# Altium PCB RacePCB.PcbDoc
Units mm, origin at the board's own origin, x right, y up, seen from the top; angles counter-clockwise.
Board outline 82.41 x 50.6 mm, 2 copper layers (Top Layer, Bottom Layer), stack 1.471 mm thick; 52 components, 47 nets, 227 pads, 42 vias.
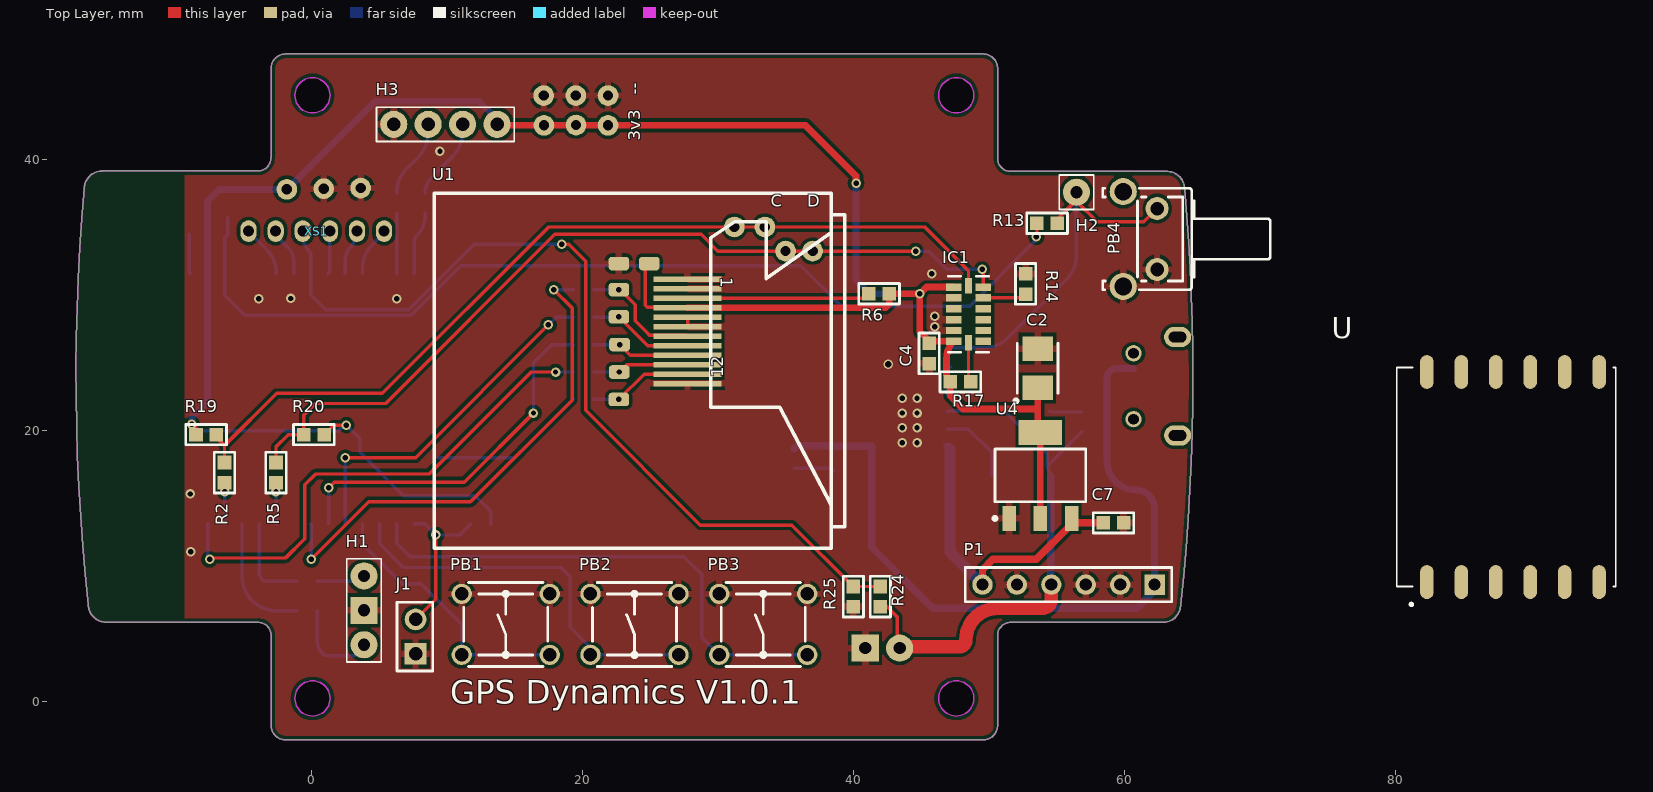
[diagram p0: Top Layer view]
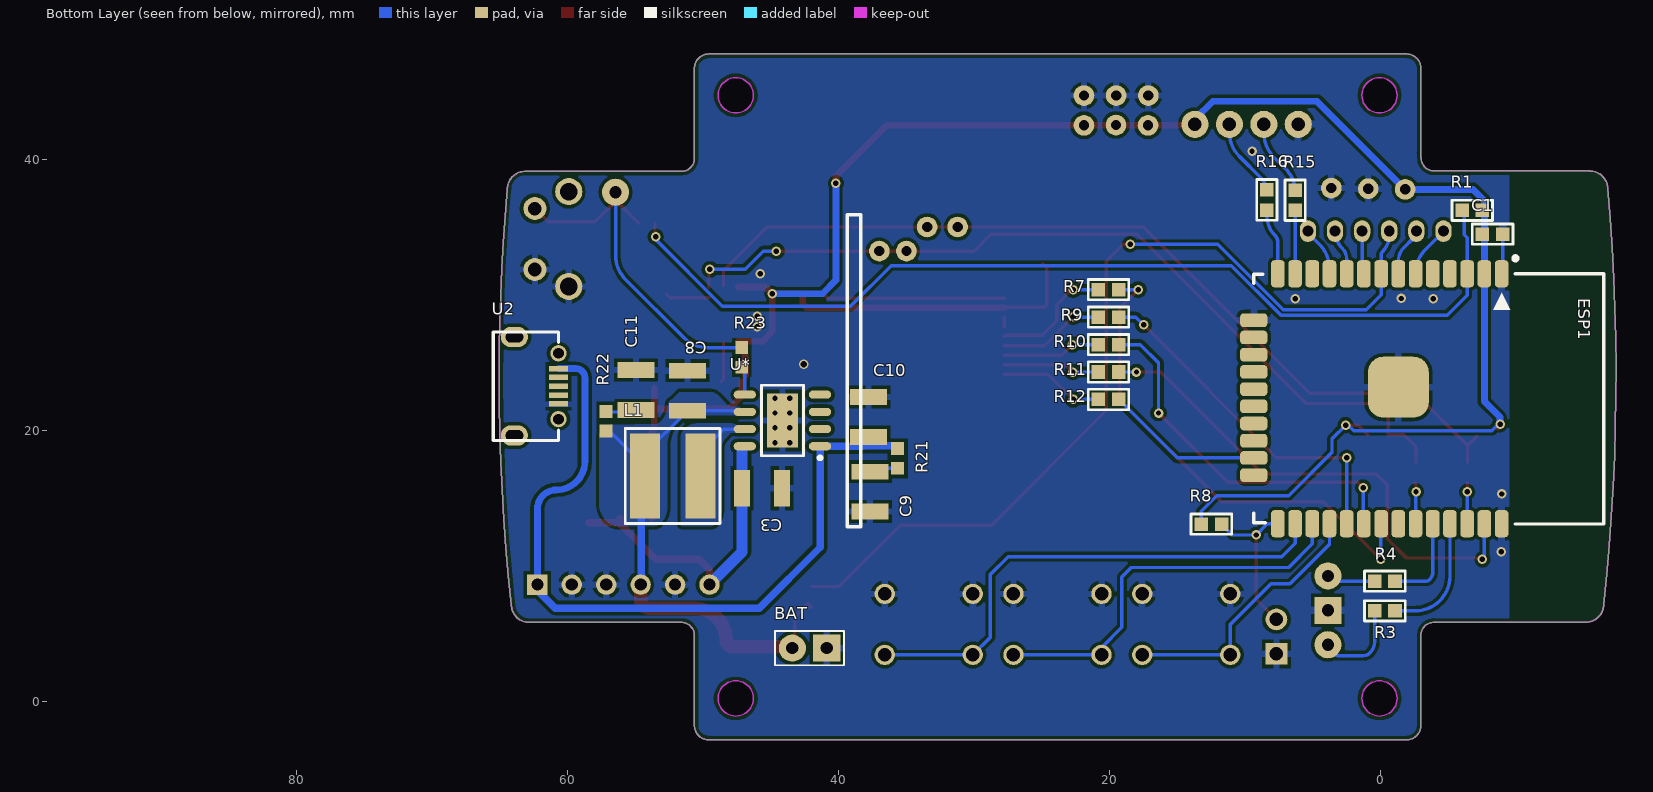
[diagram p1: Bottom Layer view, seen from below]
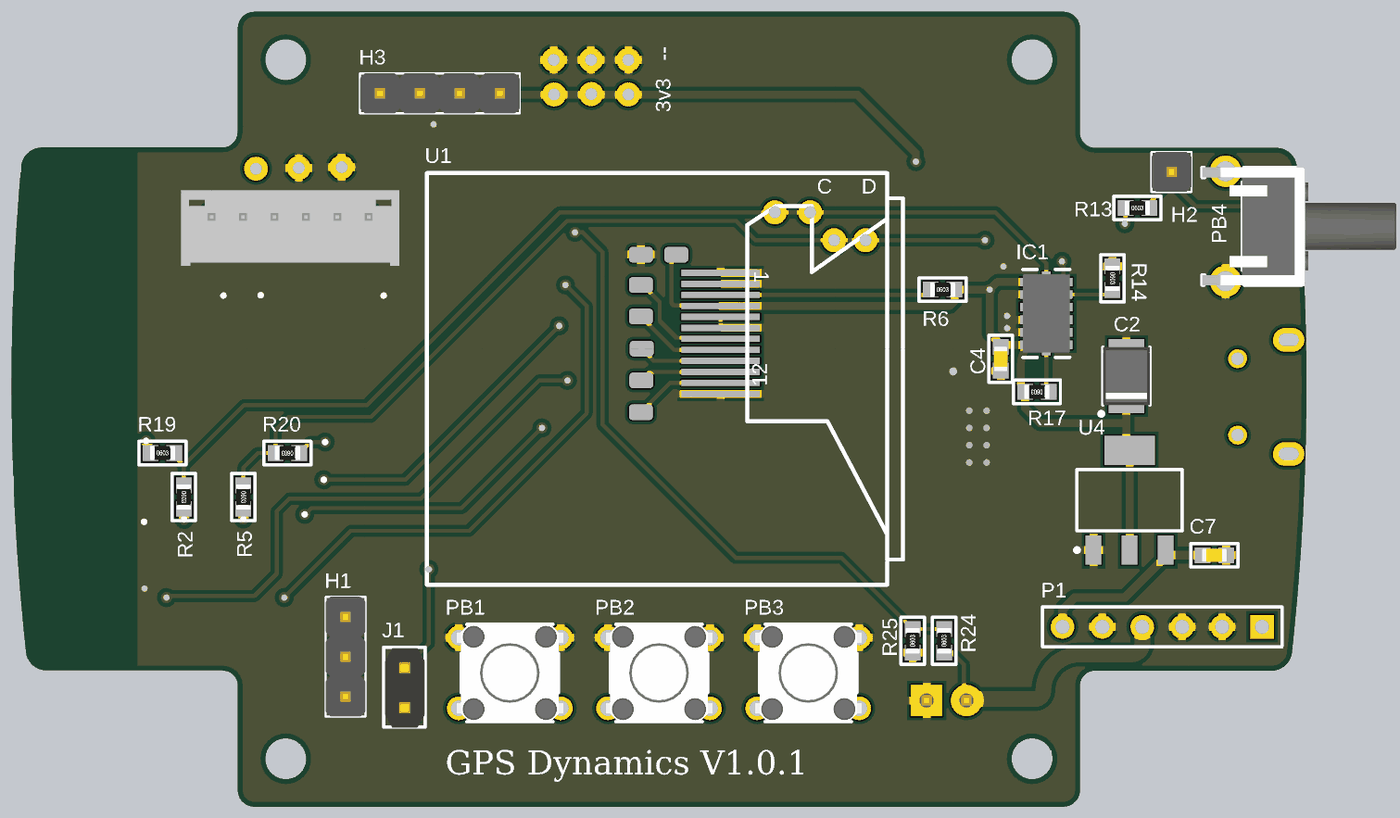
[diagram p2: 3D render of the assembled board from above, using the file's embedded part models]
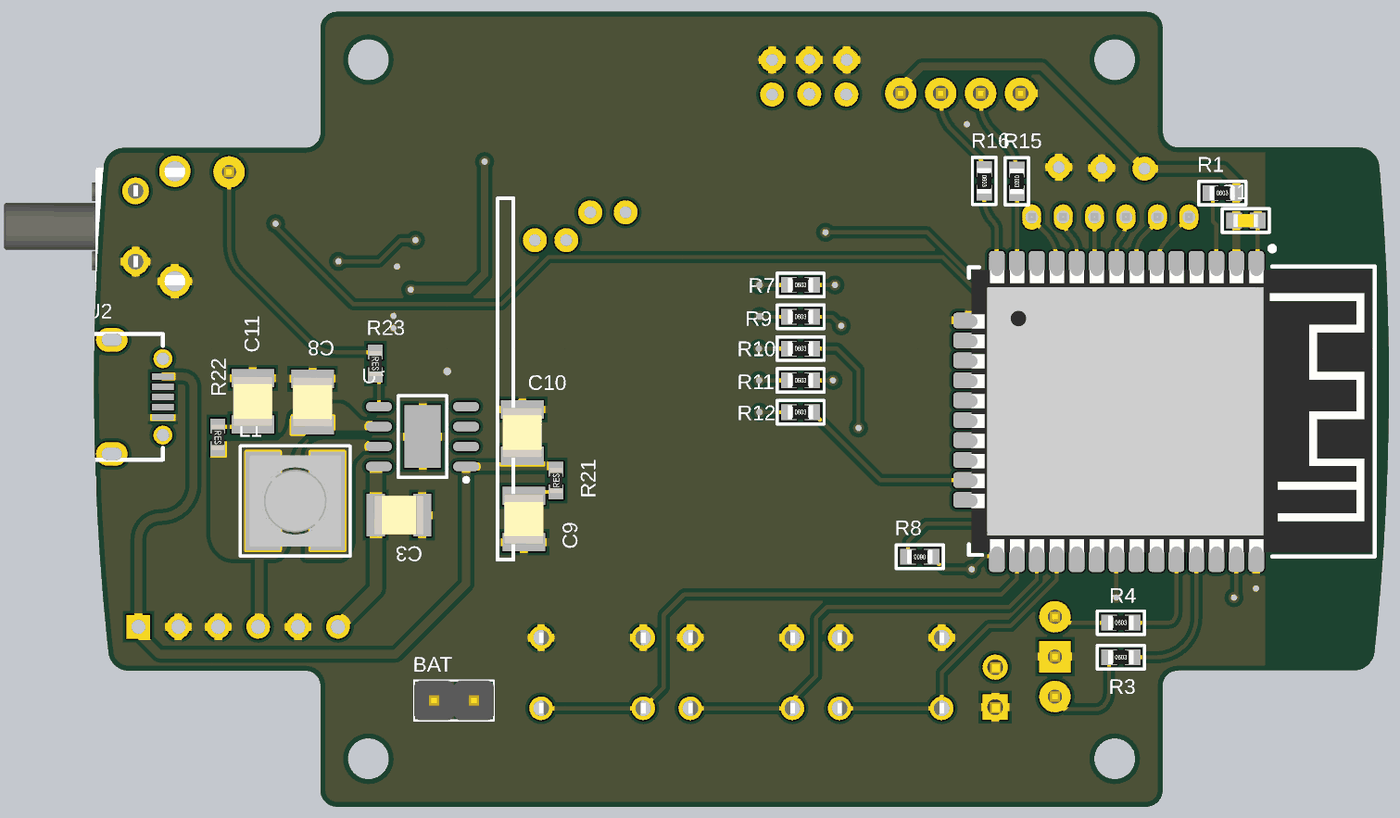
[diagram p3: 3D render of the assembled board from below, using the file's embedded part models]

## Layer stack, top to bottom
Top Solder: solder mask 0.0102, Solder Resist, Dk 3.5
Top Layer: signal copper 0.0356
Dielectric 1: dielectric 1.4, FR-4, Dk 4.8
Bottom Layer: signal copper 0.0356
Bottom Solder: solder mask 0.0102, Solder Resist, Dk 3.5

## Board outline
-15.144,5.865 ccw(c-15.13,5.914) -15.13,5.863 -3.941,5.863 ccw(c-3.904,5.898) -3.904,5.848 cw(c-3.904,4.898) -2.955,4.899 cw(c-3.904,4.898) -2.955,4.898 -2.955,-1.76 ccw(c-1.904,-1.76) -1.904,-2.81 49.596,-2.81 ccw(c49.596,-1.76) 50.646,-1.76 50.646,4.898 cw(c51.596,4.898) 51.595,5.848 cw(c51.596,4.898) 51.596,5.848 63,5.848 ccw(c63,5.898) 63.037,5.864 ccw(c62.83,7.168) 64.15,7.154 ccw(c64.102,7.168) 64.152,7.163 ccw(c-92.9,24.058) 65.058,24.058 ccw(c-92.9,24.058) 64.458,37.817 ccw(c64.407,37.813) 64.45,37.84 ccw(c63.13,37.812) 63.13,39.133 51.596,39.133 ccw(c51.596,39.082) 51.595,39.133 ccw(c51.596,40.082) 51.596,39.133 51.595,39.133 cw(c51.596,40.082) 50.646,40.082 50.646,46.74 ccw(c49.596,46.74) 49.596,47.791 -1.904,47.791 ccw(c-1.904,46.74) -2.955,46.74 -2.955,40.462 ccw(c-2.904,40.462) -2.955,40.462 cw(c-2.904,40.462) -2.955,40.462 -2.955,40.151 ccw(c-2.929,40.107) -2.98,40.107 cw(c-3.929,40.107) -3.929,39.158 -15.43,39.158 ccw(c-15.43,39.107) -15.457,39.15 ccw(c-15.43,37.83) -16.75,37.857 ccw(c-16.707,37.831) -16.758,37.835 ccw(c140.6,24.075) -16.452,7.18 ccw(c-16.402,7.186) -16.45,7.172 ccw(c-15.13,7.186)
cut-out: 0.096,43.44 cw(c0.096,44.74) -1.204,44.74 cw(c0.096,44.74) 0.096,46.04 cw(c0.096,44.74) 1.396,44.74 cw(c0.096,44.74)
cut-out: 47.596,-1.06 cw(c47.596,0.24) 46.296,0.24 cw(c47.596,0.24) 47.596,1.54 cw(c47.596,0.24) 48.896,0.24 cw(c47.596,0.24)
cut-out: 47.596,43.44 cw(c47.596,44.74) 46.296,44.74 cw(c47.596,44.74) 47.596,46.04 cw(c47.596,44.74) 48.896,44.74 cw(c47.596,44.74)
cut-out: 0.096,-1.06 cw(c0.096,0.24) -1.204,0.24 cw(c0.096,0.24) 0.096,1.54 cw(c0.096,0.24) 1.396,0.24 cw(c0.096,0.24)

## Design rules (kind name [scope] priority, off if disabled: settings)
Clearance [All] p1: gap=0.254 ignorepadtopadclearanceinfootprint=FALSE except(0: Arc-Hole Track-Hole SMDPad-Hole THPad-Hole Via-Hole Fill-Hole Poly-Hole Region-Hole Text-Hole; 0.15: Arc-Arc Arc-Track Arc-SMDPad Arc-THPad Track-Track Track-SMDPad Track-THPad SMDPad-THPad; 0.16: SMDPad-SMDPad Via-Via)
DiffPairsRouting [All] p1: maxlimit=0.254 minlimit=0.254 mostfreqgap=0.254 substack1={D8A0D76C-A163-4D49-8B95-EF9F790AB372} toplayer_{d8a0d76c-a163-4d49-8b95-ef9f790ab372}_minwidth=0.381 toplayer_{d8a0d76c-a163-4d49-8b95-ef9f790ab372}_maxwidth=0.381 toplayer_{d8a0d76c-a163-4d49-8b95-ef9f790ab372}_prefwidth=0.381 bottomlayer_{d8a0d76c-a163-4d49-8b95-ef9f790ab372}_minwidth=0.381 bottomlayer_{d8a0d76c-a163-4d49-8b95-ef9f790ab372}_maxwidth=0.381 bottomlayer_{d8a0d76c-a163-4d49-8b95-ef9f790ab372}_prefwidth=0.381 toplayer_minwidth=0.381 toplayer_maxwidth=0.381 toplayer_prefwidth=0.381 bottomlayer_minwidth=0.381 bottomlayer_maxwidth=0.381 bottomlayer_prefwidth=0.381 substack2={BD9FC2C7-C483-4D3E-8BF1-E7DEDD24914E} toplayer_{bd9fc2c7-c483-4d3e-8bf1-e7dedd24914e}_minwidth=0.381 toplayer_{bd9fc2c7-c483-4d3e-8bf1-e7dedd24914e}_maxwidth=0.381 toplayer_{bd9fc2c7-c483-4d3e-8bf1-e7dedd24914e}_prefwidth=0.381 bottomlayer_{bd9fc2c7-c483-4d3e-8bf1-e7dedd24914e}_minwidth=0.381 bottomlayer_{bd9fc2c7-c483-4d3e-8bf1-e7dedd24914e}_maxwidth=0.381 bottomlayer_{bd9fc2c7-c483-4d3e-8bf1-e7dedd24914e}_prefwidth=0.381 substack3={1EFFDBEA-9FED-4FCF-A9CA-C4440135E14E} toplayer_{1effdbea-9fed-4fcf-a9ca-c4440135e14e}_minwidth=0.381 toplayer_{1effdbea-9fed-4fcf-a9ca-c4440135e14e}_maxwidth=0.381 toplayer_{1effdbea-9fed-4fcf-a9ca-c4440135e14e}_prefwidth=0.381 bottomlayer_{1effdbea-9fed-4fcf-a9ca-c4440135e14e}_minwidth=0.381 bottomlayer_{1effdbea-9fed-4fcf-a9ca-c4440135e14e}_maxwidth=0.381 bottomlayer_{1effdbea-9fed-4fcf-a9ca-c4440135e14e}_prefwidth=0.381 substack4={FE495830-77FC-433B-A636-6D7732C50535} toplayer_{fe495830-77fc-433b-a636-6d7732c50535}_minwidth=0.381 toplayer_{fe495830-77fc-433b-a636-6d7732c50535}_maxwidth=0.381 toplayer_{fe495830-77fc-433b-a636-6d7732c50535}_prefwidth=0.381 bottomlayer_{fe495830-77fc-433b-a636-6d7732c50535}_minwidth=0.381 bottomlayer_{fe495830-77fc-433b-a636-6d7732c50535}_maxwidth=0.381 bottomlayer_{fe495830-77fc-433b-a636-6d7732c50535}_prefwidth=0.381 substack5={227D9C50-42BD-4999-8AFD-7D6AE16B60EC} toplayer_{227d9c50-42bd-4999-8afd-7d6ae16b60ec}_minwidth=0.381 toplayer_{227d9c50-42bd-4999-8afd-7d6ae16b60ec}_maxwidth=0.381 toplayer_{227d9c50-42bd-4999-8afd-7d6ae16b60ec}_prefwidth=0.381 bottomlayer_{227d9c50-42bd-4999-8afd-7d6ae16b60ec}_minwidth=0.381 bottomlayer_{227d9c50-42bd-4999-8afd-7d6ae16b60ec}_maxwidth=0.381 bottomlayer_{227d9c50-42bd-4999-8afd-7d6ae16b60ec}_prefwidth=0.381 maxuncoupledlength=12.7
PolygonConnect PolygonConnect_2 [All vs IsNamedPolygon('GD') Or  IsNamedPolygon('GD')] p1: thpad.connectstyle=Relief thpad.reliefconductorwidth=0.5 thpad.reliefentries=4 thpad.polygonreliefangle="90 Angle" thpad.airgapwidth=0.254 smdpad.connectstyle=Relief smdpad.reliefconductorwidth=0.5 smdpad.reliefentries=4 smdpad.polygonreliefangle="90 Angle" smdpad.airgapwidth=0.254 via.connectstyle=Direct via.reliefconductorwidth=0.254 via.reliefentries=4 via.polygonreliefangle="90 Angle" via.airgapwidth=0.254
PolygonConnect PolygonConnect_1 [All vs IsNamedPolygon('BAT')] p2: thpad.connectstyle=Relief thpad.reliefconductorwidth=0.254 thpad.reliefentries=4 thpad.polygonreliefangle="90 Angle" thpad.airgapwidth=0.254 smdpad.connectstyle=Direct smdpad.reliefconductorwidth=0.254 smdpad.reliefentries=4 smdpad.polygonreliefangle="90 Angle" smdpad.airgapwidth=0.254 via.connectstyle=Direct via.reliefconductorwidth=0.254 via.reliefentries=4 via.polygonreliefangle="90 Angle" via.airgapwidth=0.254
PolygonConnect [All] p3: connectstyle=Relief reliefconductorwidth=0.254 reliefentries=4 polygonreliefangle="90 Angle" airgapwidth=0.254
RoutingVias [All] p1: holewidth=0.4 width=0.7 viastyle="Through Hole" minholewidth=0.4 minwidth=0.4 maxholewidth=0.711 maxwidth=1.27
SolderMaskExpansion [All] p1: expansion=0.102 istentingtop=FALSE
Width [All] p1: maxlimit=1 minlimit=0.15 preferedwidth=0.254 substack1={D8A0D76C-A163-4D49-8B95-EF9F790AB372} substack2={BD9FC2C7-C483-4D3E-8BF1-E7DEDD24914E} substack3={1EFFDBEA-9FED-4FCF-A9CA-C4440135E14E} substack4={FE495830-77FC-433B-A636-6D7732C50535} substack5={227D9C50-42BD-4999-8AFD-7D6AE16B60EC}
29 further rules are at their usual default settings.

## Components (designator, comment, footprint, x,y, rotation, side; value= is the part's Value field where it differs from the comment)
BAT "H-1x2" J1x2 42.15,3.95 r0 bottom
C1 "" C0603 -8.25,34.5 r0 bottom value=0.1uF
C2 "47 uC" CAPMP3528X210N 53.6,24.6 r90 top value=100uF
C3 "CAP" CAP1210 45.65,15.75 r180 bottom value=100uF
C4 "" C0603 45.6,25.7 r270 top value=0.1uF
C7 "" C0603 59.2,13.2 r0 top value=0.1uF
C8 "CAP" CAP1210 51.15,22.95 r90 bottom value=100uF
C9 "CAP" CAP1210 37.7,15.5 r270 bottom value=100uF
C10 "CAP" CAP1210 37.8,21 r90 bottom value=100uF
C11 "CAP" CAP1210 54.95,23 r90 bottom value=100uF
ESP1 "ESP32-S AI-THINKER" ESP32-S 0.229,22.352 r270 bottom
H1 "H-1x3" J1x3 3.9,6.74 r90 top
H2 "H-1" J1 56.464,37.592 r0 top
H3 "GPS" J1x4 9.9,42.6 r180 top
IC1 "ADXL343BCCZ" ANALOG-DEVICES_CC-14-1 48.498,28.589 r0 top
J1 "PLD-2" PLD-2 7.7,4.8 r180 top
L1 "INDUCTOR_2" SRR5028-4R2Y 52.25,16.65 r270 bottom value=5.3uH
P1 "Header 6" HDR1X6 62.23,8.636 r180 top
PB1 "Push Button" PB_OMRON_B3F-1000 14.352,5.701 r0 top
PB2 "Push Button" PB_OMRON_B3F-1000 23.852,5.701 r0 top
PB3 "Push Button" PB_OMRON_B3F-1000 33.352,5.701 r0 top
PB4 "Push Button" PB_ALPS_SKHHLQA010 61.163,34.138 r180 top
R1 "RESISTOR" R0603(1608) -6.75,36.25 r180 bottom value=4k7
R2 "RESISTOR" R0603(1608) -6.4,16.9 r270 top value=100R
R3 "RESISTOR" R0603(1608) -0.3,6.7 r180 bottom value=100R
R4 "RESISTOR" R0603(1608) -0.3,8.9 r180 bottom value=100R
R5 "RESISTOR" R0603(1608) -2.6,16.9 r270 top value=100R
R6 "RESISTOR" R0603(1608) 41.9,30.1 r0 top value=4k7
R7 "RESISTOR" R0603(1608) 20.09,30.4 r180 bottom value=4k7
R8 "RESISTOR" R0603(1608) 12.5,13.1 r0 bottom value=100R
R9 "RESISTOR" R0603(1608) 20.09,28.375 r180 bottom value=4k7
R10 "RESISTOR" R0603(1608) 20.09,26.35 r180 bottom value=4k7
R11 "RESISTOR" R0603(1608) 20.09,24.325 r180 bottom value=4k7
R12 "RESISTOR" R0603(1608) 20.09,22.3 r180 bottom value=4k7
R13 "RESISTOR" R0603(1608) 54.3,35.3 r0 top value=4k7
R14 "RESISTOR" R0603(1608) 52.714,30.824 r270 top value=100R
R15 "RESISTOR" R0603(1608) 6.325,37 r270 bottom value=100R
R16 "RESISTOR" R0603(1608) 8.4,37.025 r270 bottom value=100R
R17 "RESISTOR" R0603(1608) 47.9,23.6 r180 top value=100R
R19 "RESISTOR" R0603(1608) -7.75,19.7 r0 top value=100R
R20 "RESISTOR" R0603(1608) 0.2,19.7 r180 top value=100R
R21 "RES" RES0603 35.65,17.95 r90 bottom value=15R
R22 "RES" RES0603 57.175,20.7 r270 bottom value=15R
R23 "RES" RES0603 47.15,25.4 r270 bottom value=15R
R24 "RESISTOR" R0603(1608) 42,7.75 r90 top value=4k7
R25 "RESISTOR" R0603(1608) 40,7.75 r90 top value=4k7
U "L80-M39" XCVR_L80-M39 88.675,16.575 r90 top
U1 "ST7789_(ZJY130-IPS)_ON_TOP" ST7789_ON_TOP 38.372,37.52 r90 top
U2 "MicroUSB" MICROUSB 60.675,23.275 r90 bottom
U4 "TLV1117LV33DCYT" TI-DCY4_N 53.8,16.7 r90 top
U* "IP5306" IP5306_GND 44.15,20.75 r0 bottom
XS1 "NXW-06" NXW-06 0.375,34.725 r0 top

## Footprints (in the part's own frame and the unit in brackets; to place one, negate y for a bottom-side part, rotate by r counter-clockwise, add the part's x,y. Pads: shape width x height; smd on the part's side, far side on the other; paste and mask are expansions set on the pad)
ANALOG-DEVICES_CC-14-1 [mm] "LGA, 0.50mm pitch, 14 Pin, 3.00mm L X 5.00mm W X 1.00mm H body, ANALOG DEVICE CC-14-1"
  rect 1.145x0.55 smd: 1(-1.098,2) 2(-1.098,1.2) 3(-1.098,0.4) 4(-1.098,-0.4) 5(-1.098,-1.2) 6(-1.098,-2) 8(1.098,-2) 9(1.098,-1.2) 10(1.098,-0.4) 11(1.098,0.4) 12(1.098,1.2) 13(1.098,2)
  rect 0.55x1.145 smd: 7(0,-2.098) 14(0,2.098)
  silkscreen extent -1.5,-2.8 1.5,2.8, body extent -1.5,-2.5 1.5,2.5, height 0.79
C0603 [mm]
  rect 1x1 smd: 1(-0.75,0) 2(0.75,0)
  silkscreen extent -1.5,-0.75 1.5,0.75, body extent -0.8,-0.43 0.8,0.43, height 0.8
CAP1210 [mm]
  rect 1.16x2.72 smd: 1(1.475,0) 2(-1.475,0)
  body extent -1.6,-1.26 1.6,1.26, height 0.57
CAPMP3528X210N [mm]
  rect 1.8x2.25 smd: 1(-1.45,0) 2(1.45,0)
  silkscreen extent -2.52,-1.5 1.85,1.72, body extent -1.85,-1.5 1.85,1.5, height 2.1
ESP32-S [mm]
  rrect50% 2x1 smd: 1(-9.221,9.144) 2(-9.221,7.874) 3(-9.221,6.604) 4(-9.221,5.334) 5(-9.221,4.064) 6(-9.221,2.794) 7(-9.221,1.524) 8(-9.221,0.254) 9(-9.221,-1.016) 10(-9.221,-2.286) 11(-9.221,-3.556) 12(-9.221,-4.826) 13(-9.221,-6.096) 14(-9.221,-7.366) 25(9.221,-7.366) 26(9.221,-6.096) 27(9.221,-4.826) 28(9.221,-3.556) 29(9.221,-2.286) 30(9.221,-1.016) 31(9.221,0.254) 32(9.221,1.524) 33(9.221,2.794) 34(9.221,4.064) 35(9.221,5.334) 36(9.221,6.604) 37(9.221,7.874) 38(9.221,9.144)
  rrect50% 1x2 smd: 15(-5.792,-9.144) 16(-4.522,-9.144) 17(-3.252,-9.144) 18(-1.982,-9.144) 19(-0.712,-9.144) 20(0.558,-9.144) 21(1.828,-9.144) 22(3.098,-9.144) 23(4.368,-9.144) 24(5.638,-9.144)
  rrect50% 4.5x4.5 smd: 39(-0.853,1.526)
  silkscreen extent -10.51,-9.14 9.24,16.69, body extent -9.01,-8.99 8.99,16.51, height 4.1
HDR1X6 [mm] "Connector; Header; 6 Position"
  rect 1.5x1.5 hole 0.9: 1(0,0)
  round 1.5 hole 0.9: 2(2.54,0) 3(5.08,0) 4(7.62,0) 5(10.16,0) 6(12.7,0)
  silkscreen extent -1.27,-1.27 13.97,1.27
IP5306_GND [mm] "SOIC, 8-Leads, Body 5,10x3,80mm, Pitch 1,27mm, Thermal Pad 4,00x2,30mm, IPC Medium Density"
  oval 1.65x0.6 smd: 1(-2.775,1.905) 2(-2.775,0.635) 3(-2.775,-0.635) 4(-2.775,-1.905) 5(2.775,-1.905) 6(2.775,-0.635) 7(2.775,0.635) 8(2.775,1.905)
  rect 2.3x4 smd: 9(0,0)
  silkscreen extent -2.9,-2.6 1.55,2.88
J1 [mm]
  round 2 hole 0.9: 1(0,0)
  silkscreen extent -1.27,-1.27 1.27,1.27, body extent -1.27,-1.27 1.27,1.27, height 10.1
J1x2 [mm]
  rect 2x2 hole 0.9: 1(-1.27,0)
  round 2 hole 0.9: 2(1.27,0)
  silkscreen extent -2.54,-1.27 2.54,1.27, body extent -2.54,-1.27 2.54,1.27, height 10.1
J1x3 [mm]
  round 2 hole 0.9: 1(-2.54,0) 3(2.54,0)
  rect 2x2 hole 0.9: 2(0,0)
  silkscreen extent -3.81,-1.27 3.81,1.27, body extent -3.81,-1.27 3.81,1.27, height 10.1
J1x4 [mm]
  round 2 hole 1: 1(-3.81,0) 2(-1.27,0) 3(1.27,0) 4(3.81,0)
  silkscreen extent -5.08,-1.27 5.08,1.27, body extent -5.08,-1.27 5.08,1.27, height 10.1
MICROUSB [mm]
  rect 0.4x1.4 smd: 1(1.3,0) 2(0.65,0) 3(0,0) 4(-0.65,0) 5(-1.301,-0.001)
  round 1.2 hole 0.8: 6(-2.431,0) 7(2.431,0)
  oval 1.5x2 hole 0.8 slot 1.3 at 90 deg: 8(-3.63,3.251) 9(3.63,3.251)
  silkscreen extent -4,0 4,4.8
NXW-06 [mm]
  oval 1.2x1.6 hole 0.8: 1(-5,0) 2(-3,0) 3(-1,0) 4(1,0) 5(3,0) 6(5,0)
  body extent -6.95,-3.1 6.95,1.7, height 6
PB_ALPS_SKHHLQA010 [mm] "Body 6x6mm, Stem height 8.35mm, Horizontal Pushbutton Switch, ALPS Serie SKHH"
  round 1.7 hole 1: 1(-1.25,-2.25) 2(-1.25,2.25)
  round 2 hole 1.3: 3(1.25,-3.5) 4(1.25,3.5)
  silkscreen extent -9.6,-3.75 2.75,3.75, body extent -9.6,-3.75 2.75,3.75, height 7.1
PB_OMRON_B3F-1000 [mm] "6x6mm Model, Horizontal, Flat Plunger Type (without Ground Terminal) Pushbutton Switch, OMRON B3F Series"
  round 1.5 hole 1: 1(-3.25,2.25) 2(3.25,2.25) 3(-3.25,-2.25) 4(3.25,-2.25)
  silkscreen extent -3.1,-3.1 3.1,3.1, body extent -3.4,-3.1 3.4,3.1, height 4.3
PLD-2 [mm]
  round 1.6 hole 1: 1(0,-1.27)
  rect 1.6x1.6 hole 1: 2(0,1.27)
  silkscreen extent -1.27,-2.54 1.37,2.54, body extent -1.24,-2.49 1.3,2.59, height 8.44
R0603(1608) [mm]
  rect 1x1 smd: 1(-0.75,0) 2(0.75,0)
  silkscreen extent -1.5,-0.75 1.5,0.75, body extent -0.8,-0.45 0.8,0.45, height 0.5
RES0603 [mm]
  rect 0.95x0.95 smd: 1(-0.725,0) 2(0.725,0)
  body extent -0.8,-0.4 0.8,0.4, height 0.3
SRR5028-4R2Y [mm]
  rect 6.3x2.2 smd: 1(0,2.05) 2(0,-2.05)
  silkscreen extent -3.5,-3.5 3.5,3.5, body extent -2.9,-2.9 2.9,2.9, height 2.8
ST7789_ON_TOP [mm]
  rect 0.4x5 smd: 1(-6.35,10.601) 2(-7.05,10.601) 3(-7.75,10.601) 4(-8.451,10.601) 5(-9.15,10.601) 6(-9.85,10.601) 7(-10.55,10.601) 8(-11.25,10.601) 9(-11.949,10.601) 10(-12.65,10.601) 11(-13.35,10.601) 12(-14.05,10.601)
  silkscreen extent -26.2,-1 0,29.3
TI-DCY4_N [mm]
  rect 1.85x1 smd: 1(-3.175,2.3) 2(-3.175,0) 3(-3.175,-2.3)
  rect 1.85x3.2 smd: 4(3.175,0)
  silkscreen extent -3.3,-3.35 1.95,3.47, body extent -1.85,-3.35 1.85,3.35, height 1.8
XCVR_L80-M39 [mm]
  oval 2.5x1 smd paste-2: 1(-7.75,6.35) 2(-7.75,3.81) 3(-7.75,1.27) 4(-7.75,-1.27) 5(-7.75,-3.81) 6(-7.75,-6.35) 7(7.75,-6.35) 8(7.75,-3.81) 9(7.75,-1.27) 10(7.75,1.27) 11(7.75,3.81) 12(7.75,6.35)
  silkscreen extent -9.5,-7.57 8.08,8.57

## Part data
C1 C4 C7: library part CAPACITOR, "Конденсатор", Название=Конденсатор
C2: library part CTE3528-21_100UF_6.3V_10%, "Polarised capacitor", Case=B, Manufacturer=GENERIC, Manufacturer1 ComponentHeight=2.1mm, Manufacturer1 Example=AVX, Manufacturer1 Part Number=TAJB107K006R, Tolerance=±10%, Voltage=6.3V, Author="CERN DEM JLC", Component Type=Standard, CreateDate=03.12.2007, HelpURL=\\cern.ch\dfs\Applications\Altium\Datasheets\CTE_AVX_TAJ.pdf, LatestRevisionDate=03.12.2007, Manufacturer Part Number=CTE3528-21_100UF_6.3V_10%, Mounted=Yes, Part Description="Solid Tantalum Chip Capacitor", Part Number=CTE3528-21_100UF_6.3V_10%, Pin Count=2, SMD=Yes, Socket=No, Status=Preferred, Table="Capacitors SMD"
C3 C8 C9 C10 C11: library part CAP-SM-1210-X5R-100uF-6.3V, "CAP SM 1210 X5R 100uF 6.3V 10%", Manufacturer=GENERIC, Package=1210, Part Number=CAP-SM-1210-X5R-100uF-6.3V
ESP1: "Wi-Fi module"
H3: library part H-1x4, Price=0.04
IC1: "3-Axis, ±2g/±4g/±8g/±16g Digital MEMS Accelerometer", Case=LGA14, Manufacturer="ANALOG DEVICES", Author="CERN DEM JLC", ComponentHeight=1mm, Component Type=Standard, CreateDate=03.06.2014, Device=ADXL343BCCZ, HelpURL=\\cern.ch\dfs\Applications\Altium\Datasheets\ADXL343BCCZ.pdf, LatestRevisionDate=03.06.2014, Manufacturer Part Number=ADXL343BCCZ, Mounted=Yes, PackageDescription="LGA, 0.50mm pitch, 14 Pin, 3.00mm L X 5.00mm W X 1.00mm H body, ANALOG DEVICE CC-14-1", Part Description="3-Axis, ±2g/±4g/±8g/±16g Digital MEMS Accelerometer", Part Number=ADXL343BCCZ, Pin Count=14, SMD=Yes, Socket=No, Table=Sensors
P1: "Header, 6-Pin", LatestRevisionDate=17-Jul-2002, LatestRevisionNote="Re-released for DXP Platform.", Publisher="Altium Limited"
PB1 PB2 PB3: library part PB_OMRON_B3F-1000, "Push-Button Switch SPDT", Manufacturer=OMRON, Manufacturer Part Number=B3F-1000, Author="CERN DEM JMW", ComponentHeight=4.5mm, Component Type=Standard, CreateDate=23.10.2008, Family="Push Button", HelpURL=\\cern.ch\dfs\Applications\Altium\Datasheets\PB_OMRON_B3F-1000.pdf, LatestRevisionDate=06.05.2009, Mounted=Yes, PackageDescription="6x6mm Model, Horizontal, Flat Plunger Type (without Ground Terminal) Pushbutton Switch, OMRON B3F Series", Part Description="24VDC 50mA SPST-NO Tactile Push-Button Switch (h=4.5mm)", Part Number=PB_OMRON_B3F-1000, Pin Count=4, SMD=No, Socket=No, Status=None, Table=Switches
PB4: library part PB_ALPS_SKHHLQA010, "Push-Button Switch SPDT", Manufacturer=ALPS, Manufacturer Part Number=SKHHLQA010, Author="CERN DEM JLC", ComponentHeight=7.4mm, Component Type=Standard, CreateDate=15.01.2009, Family="Push Button", HelpURL=\\cern.ch\dfs\Applications\Altium\Datasheets\PB_ALPS_SKHHLQA010.pdf, LatestRevisionDate=15.01.2009, Mounted=Yes, PackageDescription="Body 6x6mm, Stem height 8.35mm, Horizontal Pushbutton Switch, ALPS Serie SKHH", Part Description="6x6mm, SPST Horizontal Pushbutton Switch, Stem height 8.35mm, Contact Rating 50mA 12VDC, Serie SKHH", Part Number=PB_ALPS_SKHHLQA010, Pin Count=4, SMD=No, Socket=No, Status=None, Table=Switches
R1 R2 R3 R4 R5 R6 R7 R8 R9 R10 R11 R12 R13 R14 R15 R16 R17 R19 R20 R24 R25: "Resistor", Название=Резистор
R21 R22 R23: library part RES-SM-0603-15R, "RES SM 0603 15R", Manufacturer=GENERIC, Package=0603, Part Number=RES-SM-0603-15R
U: "L80 is an ultra compact GPS POT _Patch on Top_ module with an embedded 15.0mm Ã— 15.0mm Ã— 4.0mm patch antenna.", Package=None, Availability=Unavailable, MF=Quectel, MP=L80-M39, Price=None, SnapEDA_Link=https://www.snapeda.com/parts/L80-M39/Quectel/view-part/51186/?ref=snap
U1: library part "ST7789_(ZJY130-IPS)_ON_TOP copy", BOM_Manufacturer Part=?, BOM_Supplier Part=undefined, Contributor="§°§Э§Ц§Ф §¬§а§б§Ц§Ы§Ь§Ъ§Я", spicePre=U
U2: BOM_Manufacturer Part=?, Contributor=SparkFun, sourceId=qPJDVoYkG, spicePre=U, timeStamp=1463643012
U4: library part TLV1117LV30DCYT, "Single Output LDO, 1 A, Fixed 3 V Output, 2 to 5.5 V Input, 4-pin SOT-223 (DCY), -40 to 125 degC, Green (RoHS & no Sb/Br)", Manufacturer="Texas Instruments", Supplier Part Number 1=296-34848-2-ND, Accuracy(%)=2, Code_JEDEC=TO-261, ComponentLink1Description="Manufacturer URL", ComponentLink1URL=http://www.ti.com/, ComponentLink2Description=Datasheet, ComponentLink2URL=http://www.ti.com/general/docs/lit/getliterature.tsp?genericPartNumber=TLV1117LV30&fileType=pdf, ComponentLink3Description="Package Specification", ComponentLink3URL=http://www.ti.com/litv/pdf/mpds094a, DatasheetVersion=SBVS160A, Eco-Plan="Green (RoHS & no Sb/Br)", Fixed Output Options(V)=3, Iout(Max)(A)=1, Iq(Typ)(mA)=0.05, Mounting Technology="Surface Mount", PackageDescription="4-Pin Plastic Small Outline, Body 3.5 x 6.5 mm, Pitch 2.3 mm", PackageReference=DCY4, PackageVersion=4202506/B, partnumber=TLV1117LV33DCYT, SubFamily="Single Channel LDO", Supplier 1=Digi-Key, Supplier 2=Farnell, Supplier 3=Newark, Supplier 4=Newark, Supplier 5=Mouser, Supplier Part Number 2=2214986, Supplier Part Number 3=45W6437, Supplier Part Number 4=27W9631, Supplier Part Number 5=595-TLV1117LV30DCYT, Vdo(Typ)(mV)=1200, Vin(Max)(V)=5.5, Vin(Min)(V)=2, Vout Adj(Max)(V)=3, Vout Adj(Min)(V)=3
U*: "2.1A_lipo_CHARGER"
XS1: "2.0mm pitch", Код заказа (Артикул)=NXW-06, Название=Разъём, Производитель=NINIGI
BAT: Price=0.02
H1: Price=0.03
H2: Price=0.01
J1: Название=Разъём
L1: Код заказа (Артикул)=SRR5028-5R3YCT

## Free pads (board coordinates)
  round 1.524 hole 0.762: 2(0.925,37.85) 3(3.65,37.9) 4(17.175,42.525) 5(19.537,42.55) 6(21.9,42.525) 7(17.15,44.725) 8(19.525,44.725) 9(21.9,44.725) 10(31.225,35.025) 10(33.475,35.025) 11(35,33.25) 11(37,33.25) 12(-1.8,37.8)
  rrect50% 1.524x1 smd: 13(22.7,22.3) 13(22.7,28.4) 13(22.7,30.4) 13(22.7,32.325) 13(22.725,24.325) 13(22.75,26.35) 13(24.95,32.325)

## Via types
v1: diameter 0.7, hole 0.4, Top Layer to Bottom Layer, tented both sides, 33 vias
v2: diameter 0.7, hole 0.4, Top Layer to Bottom Layer, tented top, 8 vias
v3: diameter 0.7, hole 0.5, Top Layer to Bottom Layer, tented both sides, 1 vias

## Nets (pads, with @x,y where several pads share a name; then routed paths per layer and width w, separated by ;. In a path a pad name is that pad's centre, name@x,y a point inside that pad or via, vN(x,y) a via of type N, cw(c..) or ccw(c..) an arc to the next point about the centre after c; other vN are vias at no path point)
5V: C3.2 C7.1 P1.6 U4.3 U*.8 | length 23.3
  Top Layer w0.55: P1.6 49.53,9.73 50.3,10.5 53.5,10.5 56.1,13.1 U4.3 56.425,13.2 C7.1
  Bottom Layer w0.55: U*.8 U*.8@47.125,18.645
  Bottom Layer w0.8: U*.8@47.125,18.645 C3.2 47.125,11.041 P1.6
5V_IN: C10.2 P1.1 R21.2 U2.1 U*.1 | length 56.2
  Bottom Layer w0.5: U2.1 59.4,24.575 ccw(c59.4,23.9) 58.725,23.9 58.725,17.725 ccw(c60.825,17.725) 60.825,15.625 cw(c60.825,14.22) 62.23,14.22 P1.1
  Bottom Layer w0.55: R21.2 35.85,18.875 38.15,18.875 38.18,18.845 U*.1 41.375,11.375 45.85,6.9 60.9,6.9 P1.1@62.3,8.3
+3.3V: C1.2 C2.1 C4.1 ESP1.2 H3.1 IC1.1 IC1.6 pad.4 pad.5 pad.6 pad.12 pad.13@24.95,32.325 R1.2 R6.2 R8.2 R17.2 R19.1 R20.1 U1.4 U4.2 U4.4 | length 165
  Top Layer w0.254: R20.1 1.65,20.4 v1(2.6,20.4) ; H3.1 13.71,42.525 H3.1@13.785,42.525 ; pad.13@24.95,32.325 24.65,32.025 24.65,29.238 24.799,29.089 27.752,29.089 U1.4
  Top Layer w0.5: v1(-8.8,20.475) -8.85,20.475 v1@-8.65,20.275 ; H3.1 13.785,42.525 pad.4 pad.6 36.475,42.525 40.2,38.8 v1(40.2,38.25) ; U1.4 42.369,29.069 42.65,29.35 R6.2 v1(44.9,30.1) ; R17.2@46.884,24.093 46.884,25.343 cw(c48.646,25.343) IC1.6 45.611,26.589 44.9,27.3 v1(44.9,30.1) ; R17.2 47.15,22.55 48.1,21.6 53.5,21.6 ; IC1.1 45.389,30.589 v1(44.9,30.1) ; C2.1 53.6,20.075 U4.4 U4.2
  Bottom Layer w0.254: v1(-8.8,20.475) -8.675,20.475 -8.2,20 2,20 2.4,20.4 v1(2.6,20.4) 3.6,19.4 3.6,18.4 6.8,15.2 12.1,15.2 13.25,14.05 R8.2
  Bottom Layer w0.5: v1(-8.8,20.475) -8.8,21 -7.645,22.155 ESP1.2 -7.65,31.578 -7.65,36.95 -6.8,37.8 pad.12 4.7,44.3 12.4,44.3 13.71,42.99 H3.1 ; v1(40.2,38.25) 40.2,31.1 41.2,30.1 v1(44.9,30.1)
ADC: ESP1.8 R24.2 R25.2 XS1.3 | length 66.2
  Top Layer w0.254: v1(18.5,33.75) 19,33.75 20.25,32.5 20.25,21.5 28.719,13.031 35.469,13.031 R25.2 R24.2
  Bottom Layer w0.254: XS1.3 -0.625,34.407 ccw(c1.082,34.407) -0.125,33.2 cw(c-0.365,32.96) -0.025,32.96 ESP1.8 -0.025,30.025 1.081,28.919 7.197,28.919 12.028,33.75 v1(18.5,33.75)
ADD1: ESP1.6 XS1.1 | length 3.9
  Bottom Layer w0.254: XS1.1 ccw(c-4.565,34.725) XS1.1@-4.607,34.682 ; XS1.1@-4.607,34.682 -3.309,33.384 cw(c-5.105,31.588) -2.565,31.588 ESP1.6
ADD2: ESP1.7 XS1.2 | length 3.6
  Bottom Layer w0.254: XS1.2 ccw(c-1.901,34.725) -2.413,34.213 -1.7,33.5 cw(c-2.677,32.523) -1.295,32.523 ESP1.7
ADD4: ESP1.9 XS1.4 | length 3.2
  Bottom Layer w0.254: ESP1.9 ccw(c0.93,31.888) 1.375,31.888 XS1.4
ADD5: ESP1.10 XS1.5 | length 3.4
  Bottom Layer w0.254: ESP1.10 2.515,32.648 cw(c3.642,32.648) 2.845,33.445 ccw(c1.564,34.725) XS1.5
ADD6: ESP1.11 XS1.6 | length 3.7
  Bottom Layer w0.254: ESP1.11 3.785,31.957 cw(c6.325,31.957) 4.529,33.754 5.287,34.512 ccw(c5.073,34.725) XS1.6
ADD7: ESP1.12
BAT+: BAT.2 C8.2 L1.2 P1.4 R22.2 R24.1 U*.6 | length 41
  Top Layer w0.254: R24.1 42.25,7 42.25,7.25 43.25,6.25 BAT.2@43.25,4.039
  Top Layer w1: BAT.2@43.25,4.039 47.777,4.039 ccw(c47.777,4.572) 48.311,4.572 cw(c50.622,4.572) 50.622,6.883 53.924,6.883 ccw(c53.924,7.569) 54.61,7.569 P1.4
  Bottom Layer w0.254: U*.6 47.015,21.475 C8.2 54.3,18.325 L1.2@54.3,17.375 ; P1.4@54.4,8.935 ccw(c55.358,9.384) P1.4 ; L1.2@54.55,16.65 54.523,16.727 L1.2@54.3,17.375 ; R22.2@56.85,19.925 L1.2@54.3,17.375
  Bottom Layer w0.55: P1.4@54.3,8.636 54.331,8.729 54.4,8.935 54.55,9.384 L1.2@54.55,16.65
EN: ESP1.3 R1.1 R13.1 | length 72.3
  Top Layer w0.254: v1(53.5,34.3) 53.55,34.35 R13.1
  Bottom Layer w0.254: -6.15,35.7 -6.15,34.45 -6.375,34.225 ESP1.3 -6.375,29.975 -4.915,28.515 7.364,28.515 11.024,32.175 36.125,32.175 39.125,29.175 48.575,29.175 53.5,34.1 v1(53.5,34.3)
GND: BAT.1 C1.1 C2.2 C3.1 C4.2 C7.2 C8.1 C9.1 C10.1 C11.1 ESP1.1 ESP1.15 ESP1.38 ESP1.39 H1.2 H3.4 IC1.2 IC1.4 IC1.5 J1.2 P1.2 P1.3 P1.5 pad.2 pad.3 pad.7 pad.8 pad.9 pad.13@22.7,32.325 PB1.1 PB1.2 PB2.1 PB2.2 PB3.1 PB3.2 PB4.2 PB4.4 R14.1 R25.1 U1.1 U1.2 U1.5 U1.6 U1.12 U2.5 U4.1 U*.9 | length 3.7
  Top Layer w0.254: U1.6 U1.5
  Bottom Layer w0.254: C1.1 -9,31.658 ESP1.1
  other v1: -8.9,11.075 -8.925,15.325 46,27.65 46,28.425 -3.875,29.725 6.325,29.725 -1.5,29.75 45.775,31.575 9.5,40.625
  other v2: 43.6,19.1 44.7,19.1 43.6,20.2 44.7,20.2 43.6,21.3 44.7,21.3 43.6,22.4 44.7,22.4
  other v3: 42.575,24.9
GPS_RX: H3.2 R16.1 | length 6
  Bottom Layer w0.254: R16.1@8.4,37.55 cw(c9.969,37.55) 8.86,38.66 10.426,40.226 ccw(c8.63,42.022) 11.17,42.022 H3.2
GPS_TX: H3.3 R15.1 | length 5.8
  Bottom Layer w0.254: R15.1@6.3,37.55 cw(c8.835,37.55) 7.042,39.342 7.886,40.186 ccw(c6.09,41.982) 8.63,41.982 H3.3
KEY: H2.1 PB4.1 R13.2 R23.1 | length 27.3
  Top Layer w0.254: R13.2@54.75,35.3 H2.1@56.464,37.014 ; H2.1 H2.1@56.464,37.014 ; PB4.1 61.426,35.4 58,35.4 56.464,36.936 H2.1@56.464,37.014
  Bottom Layer w0.254: R23.1 49.648,26.125 ccw(c49.648,28.665) 51.444,26.869 55.72,31.145 ccw(c53.924,32.941) 56.464,32.941 H2.1
LCD_CLK: ESP1.30 R10.2 | length 27.3
  Top Layer w0.254: v1(1.3,15.8) 1.7,16.2 11.3,16.2 v1(16.4,21.3)
  Bottom Layer w0.254: ESP1.30 1.3,13.186 v1(1.3,15.8) ; v1(16.4,21.3) 16.4,25 17.75,26.35 R10.2
LCD_CS: ESP1.29 R9.2 | length 26
  Top Layer w0.254: v1(2.515,18) 7.7,18 v1(17.5,27.8)
  Bottom Layer w0.254: ESP1.29 v1(2.515,18) ; v1(17.5,27.8) 18.075,28.375 R9.2
LCD_DAT: ESP1.37 R11.2 | length 37.5
  Top Layer w0.254: v1@-7.5,10.6 -1.9,10.6 -0.475,12.025 -0.475,16 0.325,16.8 8.7,16.8 16.225,24.325 v1(18.025,24.325)
  Bottom Layer w0.254: ESP1.37 -7.645,10.645 v1(-7.5,10.5) ; v1(18.025,24.325) R11.2
LCD_DC: ESP1.31 R7.2 | length 36.9
  Top Layer w0.254: v1(0,10.5) 4.25,14.75 11.75,14.75 19.25,22.25 19.25,29.05 v1(17.9,30.4)
  Bottom Layer w0.254: ESP1.31 0,13.106 v1(0,10.5) ; v1(17.9,30.4) R7.2
LCD_RST: ESP1.23 R12.2 | length 11.8
  Bottom Layer w0.254: ESP1.23 15.024,17.984 R12.2
NetC9_2: C9.2 R21.1 | length 3
  Bottom Layer w0.254: R21.1 38.35,17.225 C9.2@38.55,17.025
NetC11_2: C11.2 R22.1 | length 2.4
  Bottom Layer w0.254: C11.2@54.45,21.475 54.55,21.375 R22.1@56.85,21.375
NetESP1_13: ESP1.13 R15.2 | length 4.5
  Bottom Layer w0.254: R15.2@6.3,36.05 6.3,31.632 ccw(c6.384,31.632) ESP1.13
NetESP1_14: ESP1.14 R16.2 | length 4.7
  Bottom Layer w0.254: ESP1.14 7.595,33.904 cw(c8.296,33.904) 7.8,34.4 ccw(c6.351,35.849) 8.4,35.849 R16.2@8.4,36.05
NetESP1_25: ESP1.25 J1.1 R8.1 | length 11.7
  Top Layer w0.254: J1.1 9.2,7.57 v1(9.2,12.3)
  Bottom Layer w0.254: ESP1.25 8.369,13.131 v1(9.2,12.3) 10.95,12.3 R8.1
NetESP1_26: ESP1.26 PB3.3 PB3.4 | length 37.9
  Bottom Layer w0.254: ESP1.26 6.325,11.675 7.3,10.7 27.5,10.7 28.8,9.4 28.8,4.754 PB3.3 PB3.4
NetESP1_27: ESP1.27 PB2.3 PB2.4 | length 29.4
  Bottom Layer w0.254: ESP1.27 5.055,11.645 6.8,9.9 18.4,9.9 19.1,9.2 19.1,5.5 20.602,3.998 PB2.3 PB2.4
NetESP1_28: ESP1.28 PB1.3 PB1.4 | length 20
  Bottom Layer w0.254: ESP1.28 3.785,11.615 6.7,8.7 8.1,8.7 11.102,5.698 PB1.3 PB1.4
NetESP1_33: ESP1.33 R5.2 | length 3.1
  Top Layer w0.254: v1(-2.6,15.5) -2.6,16.05 R5.2@-2.5,16.15
  Bottom Layer w0.254: v1(-2.6,15.5) -2.565,15.465 ESP1.33
NetESP1_34: ESP1.34 R4.2 | length 6.8
  Bottom Layer w0.254: ESP1.34 -3.835,9.568 ccw(c-3.032,9.568) -3.6,9 ccw(c-3.359,9.241) -3.359,8.9 R4.2
NetESP1_35: ESP1.35 R3.2 | length 9.4
  Bottom Layer w0.254: ESP1.35 -5.105,9.258 ccw(c-2.565,9.258) -4.361,7.461 -4.344,7.444 ccw(c-2.548,9.24) -2.548,6.7 R3.2
NetESP1_36: ESP1.36 R2.2 | length 3
  Top Layer w0.254: R2.2 -6.4,15.5 v1(-6.375,15.475)
  Bottom Layer w0.254: ESP1.36 v1(-6.375,15.475)
NetIC1_7: IC1.7 R17.1 | length 3
  Top Layer w0.254: IC1.7 48.498,23.752 R17.1
NetIC1_12: IC1.12 R14.2 | length 3.2
  Top Layer w0.254: IC1.12 52.429,29.789 R14.2
NetL1_1: L1.1 U*.7 | length 5.7
  Bottom Layer w0.254: U*.7 48.485,20.115 50.2,18.4 L1.1
NetR6_1: R6.1 U1.3 | length 13.5
  Top Layer w0.254: U1.3 40.82,29.77 R6.1
NetR7_1: pad.13@22.7,30.4 R7.1 U1.7 | length 9.1
  Top Layer w0.254: v1(22.7,30.4) 22.895,30.4 23.259,30.036 23.259,29.941 23.9,29.3 23.9,28.1 24.75,27.25 24.957,27.043 27.699,27.043 U1.7
  Bottom Layer w0.254: R7.1 v1(22.7,30.4)
NetR9_1: pad.13@22.7,28.4 R9.1 U1.8 | length 7.8
  Top Layer w0.254: v1(22.7,28.4) 24.83,26.27 U1.8
  Bottom Layer w0.254: R9.1 22.675,28.375 v1(22.7,28.4)
NetR10_1: pad.13@22.75,26.35 R10.1 U1.9 | length 7.3
  Top Layer w0.254: v1(22.75,26.35) 23.53,25.57 U1.9
  Bottom Layer w0.254: R10.1 v1(22.75,26.35)
NetR11_1: pad.13@22.725,24.325 R11.1 U1.10 | length 7.2
  Top Layer w0.254: v1(22.725,24.325) 23.269,24.869 U1.10
  Bottom Layer w0.254: R11.1 v1(22.725,24.325)
NetR12_1: pad.13@22.7,22.3 R12.1 U1.11 | length 7.7
  Top Layer w0.254: v1(22.7,22.3) 24.569,24.169 U1.11
  Bottom Layer w0.254: R12.1 v1(22.7,22.3)
NetR23_2: R23.2 U*.5 | length 2.2
  Bottom Layer w0.254: U*.5 46.925,24.675 R23.2
PRG_RXD0_ESP1: H1.3 R4.1 | length 4
  Bottom Layer w0.254: R4.1 3.27,8.9 H1.3@3.9,9.53 ; H1.3@3.61,8.9 cw(c3.61,8.49) H1.3@3.9,8.78
PRG_TXD0_ESP1: H1.1 R3.1 | length 6.4
  Bottom Layer w0.254: R3.1 0.45,4.445 ccw(c1.645,4.445) 0.8,3.6 ccw(c1.283,4.083) 1.283,3.4 3.176,3.4 ccw(c3.176,4.424) H1.1@3.9,3.7
SCL: IC1.14 pad.10 R2.1 R19.2 | length 66.3
  Top Layer w0.254: R19.2@-7.1,19.6 -6.4,18.9 ; R2.1 -6.4,18.9 ; IC1.14 48.498,31.802 45.275,35.025 33.475,35.025 31.225,35.025 17.525,35.025 5.25,22.75 -2.55,22.75 -6.4,18.9
SDA: IC1.13 pad.11 R5.1 R20.2 | length 63.2
  Top Layer w0.254: R5.1 -2.6,18.8 -1.7,19.7 R20.2 -0.55,21.15 0.3,22 5.5,22 17.981,34.481 28.769,34.481 30,33.25 35,33.25 37,33.25 v1(44.6,33.25) v1@44.75,33.4 ; v1(49.5,31.9) 49.596,31.804 IC1.13
  Bottom Layer w0.254: v1(44.6,33.25) 45.55,33.25 46.9,31.9 v1(49.5,31.9)
pads on no net: ESP1.4 ESP1.5 ESP1.16 ESP1.17 ESP1.18 ESP1.19 ESP1.20 ESP1.21 ESP1.22 ESP1.24 ESP1.32 IC1.3 IC1.8 IC1.9 IC1.10 IC1.11 PB4.3 U2.2 U2.3 U2.4 U2.6 U2.7 U2.8 U2.9 U*.2 U*.3 U*.4 U.1 U.2 U.3 U.4 U.5 U.6 U.7 U.8 U.9 U.10 U.11 U.12

## Polygon pours and split planes (outlines as drawn)
BAT+ on Bottom Layer "BAT" (solid, remove dead copper, pour order 2): 47.05,21.15 50.909,21.15 cw(c50.909,19.784) 51.875,20.75 51.906,20.719 cw(c50.11,18.923) 52.65,18.923 52.65,14.357 ccw(c54.357,14.357) 53.15,13.15 ccw(c53.633,13.633) 53.633,12.95 56.184,12.95 ccw(c56.184,14.316) 57.15,13.35 ccw(c55.943,14.557) 57.65,14.557 57.65,19.667 ccw(c56.967,19.667) 57.45,20.15 ccw(c56.726,19.426) 56.726,20.45 53.375,20.5 cw(c54.195,21.848) 52.662,21.475 52.575,22.025 ccw(c52.07,21.816) 52.279,22.321 51.75,22.85 49.45,22.85 ccw(c49.45,22.126) 48.938,22.638 48.262,21.962 cw(c47.75,22.474) 47.75,21.75 47.35,21.75 47.203,21.603 ccw(c47.331,21.475) 47.15,21.475
NetL1_1 on Bottom Layer "BAT" (solid, remove dead copper, pour order 0): 46.95,19.85 47.75,19.85 cw(c47.75,19.367) 48.091,19.709 48.35,19.45 cw(c47.626,18.726) 48.65,18.726 48.65,14.257 ccw(c50.357,14.257) 49.15,13.05 ccw(c49.391,13.291) 49.391,12.95 51.509,12.95 ccw(c51.509,13.291) 51.75,13.05 cw(c51.991,13.291) 51.65,13.291 51.65,19.55 ccw(c50.926,19.55) 51.438,20.062 51.35,20.15 ccw(c50.384,19.184) 50.384,20.55 47.933,20.55 ccw(c47.933,19.867) 47.45,20.35
GND on Bottom Layer "GD" (solid, remove dead copper, pour order 10): -9.475,55.525 -9.475,-3.5 69.7,-3.5 69.7,55.775
GND on Top Layer "GD" (solid, remove dead copper, pour order 12): -9.35,55.775 -9.35,-5.625 68.45,-5.625 68.45,57.4

## Keep-outs
Keep-Out Layer:
  lines w0.1: -16.758,37.835 ccw(c140.6,24.075) -16.452,7.18 ; -16.758,37.835 cw(c-16.707,37.831) -16.75,37.857 ; -16.758,37.835 -16.758,37.835 ; -16.75,37.857 cw(c-15.43,37.83) -15.457,39.15 cw(c-15.43,39.107) -15.43,39.158 -3.929,39.158 ccw(c-3.929,40.107) -2.98,40.107 cw(c-2.929,40.107) -2.955,40.151 -2.955,40.462 ; -16.75,37.857 -16.75,37.857 ; -16.452,7.18 ccw(c-16.402,7.186) -16.45,7.172 ccw(c-15.13,7.186) -15.144,5.865 ccw(c-15.13,5.914) -15.13,5.863 -3.941,5.863 ccw(c-3.904,5.898) -3.904,5.848 cw(c-3.904,4.898) -2.955,4.899 ; -16.452,7.18 -16.452,7.18 ; -2.955,4.898 ccw(c-3.904,4.898) -2.955,4.899 ; -2.955,4.898 -2.955,-1.76 ccw(c-1.904,-1.76) -1.904,-2.81 49.596,-2.81 ccw(c49.596,-1.76) 50.646,-1.76 50.646,4.898 cw(c51.596,4.898) 51.595,5.848 cw(c51.596,4.898) 51.596,5.848 ; -2.955,4.898 -2.955,4.898 ; -2.955,40.462 ccw(c-2.904,40.462) -2.955,40.462 ; -2.955,40.462 ccw(c-2.904,40.462) -2.955,40.462 -2.955,40.462 ; -2.955,40.462 -2.955,46.74 cw(c-1.904,46.74) -1.904,47.791 49.596,47.791 cw(c49.596,46.74) 50.646,46.74 ; 50.646,46.74 50.646,46.74 ; 50.646,46.74 50.646,40.082 ccw(c51.596,40.082) 51.595,39.133 ; 51.595,39.133 ccw(c51.596,40.082) 51.596,39.133 ; 51.595,39.133 cw(c51.596,39.082) 51.596,39.133 ; 51.595,39.133 51.596,39.133 ; 51.596,5.848 63,5.848 ccw(c63,5.898) 63.037,5.864 ccw(c62.83,7.168) 64.15,7.154 ccw(c64.102,7.168) 64.152,7.163 ; 51.596,5.848 51.596,5.848 ; 51.596,39.133 63.13,39.133 cw(c63.13,37.812) 64.45,37.84 ; 64.152,7.163 ccw(c-92.9,24.058) 65.058,24.058 ccw(c-92.9,24.058) 64.458,37.817 ; 64.152,7.163 64.152,7.163 ; 64.45,37.84 cw(c64.407,37.813) 64.458,37.817 ; 64.45,37.84 64.45,37.84 ; 64.458,37.817 64.458,37.817 ; -1.204,0.24 cw(c0.096,0.24) 0.096,1.54 cw(c0.096,0.24) 1.396,0.24 cw(c0.096,0.24) 0.096,-1.06 cw(c0.096,0.24) -1.204,0.24 ; -1.204,44.74 cw(c0.096,44.74) 0.096,46.04 cw(c0.096,44.74) 1.396,44.74 cw(c0.096,44.74) 0.096,43.44 cw(c0.096,44.74) -1.204,44.74 ; 46.296,0.24 cw(c47.596,0.24) 47.596,1.54 cw(c47.596,0.24) 48.896,0.24 cw(c47.596,0.24) 47.596,-1.06 cw(c47.596,0.24) 46.296,0.24 ; 46.296,44.74 cw(c47.596,44.74) 47.596,46.04 cw(c47.596,44.74) 48.896,44.74 cw(c47.596,44.74) 47.596,43.44 cw(c47.596,44.74) 46.296,44.74

## Silkscreen, mask and mechanical layers (free items; w line width, h text height)
Top Overlay:
  text "3v3   --" at 24.575,41.4 h1.52 r90
  text "C     D" at 33.9,36.225 h1.52
  text "GPS Dynamics V1.0.1" at 10.25,-0.75 h3
Mechanical 7:
  lines w0.1: -16.707,37.831 ccw(c140.6,24.075) -16.402,7.186 ; -16.7,37.83 cw(c-15.43,37.83) -15.43,39.1 ; -16.4,7.186 ccw(c-15.13,7.186) -15.13,5.916 ; -15.43,39.107 -3.929,39.107 ccw(c-3.929,40.107) -2.929,40.107 ; -15.13,5.914 -3.904,5.914 ; -3.904,5.898 cw(c-3.904,4.898) -2.904,4.898 ; -2.904,40.082 -2.904,40.462 ; 62.83,5.898 ccw(c62.83,7.168) 64.1,7.168 ccw(c-92.902,24.058) 64.406,37.813 ; 63,5.898 51.596,5.898 ; 64.4,37.812 ccw(c63.13,37.812) 63.13,39.082 51.596,39.082 ; -2.904,4.898 -2.904,4.898 ; -2.904,4.898 -2.904,-1.76 ccw(c-1.904,-1.76) -1.904,-2.76 49.596,-2.76 ccw(c49.596,-1.76) 50.596,-1.76 50.596,4.898 cw(c51.596,4.898) 51.596,5.898 ; -2.904,40.462 -2.904,40.462 ; -2.904,40.462 -2.904,46.74 cw(c-1.904,46.74) -1.904,47.74 49.596,47.74 cw(c49.596,46.74) 50.596,46.74 ; 50.596,46.74 50.596,40.082 ccw(c51.596,40.082) 51.596,39.082 ; 50.596,46.74 50.596,46.74 ; 51.596,5.898 51.596,5.898 ; 51.596,39.082 51.596,39.082 ; -1.204,0.24 cw(c0.096,0.24) 0.096,1.54 cw(c0.096,0.24) 1.396,0.24 cw(c0.096,0.24) 0.096,-1.06 cw(c0.096,0.24) -1.204,0.24 ; -1.204,44.74 cw(c0.096,44.74) 0.096,46.04 cw(c0.096,44.74) 1.396,44.74 cw(c0.096,44.74) 0.096,43.44 cw(c0.096,44.74) -1.204,44.74 ; 46.296,0.24 cw(c47.596,0.24) 47.596,1.54 cw(c47.596,0.24) 48.896,0.24 cw(c47.596,0.24) 47.596,-1.06 cw(c47.596,0.24) 46.296,0.24 ; 46.296,44.74 cw(c47.596,44.74) 47.596,46.04 cw(c47.596,44.74) 48.896,44.74 cw(c47.596,44.74) 47.596,43.44 cw(c47.596,44.74) 46.296,44.74

## Text inside footprints (layer, text, board x,y; h text height)
U1: Top Overlay "12" at 30.709,23.951 h1.52 r90; Top Overlay "1" at 29.908,31.301 h1.52 r270